# Altium PCB uppsense.PcbDoc
Units mm, origin at the board's own origin, x right, y up, seen from the top; angles counter-clockwise.
Board outline 80 x 50 mm, 2 copper layers (Top Layer, Bottom Layer), stack 1.58 mm thick; 39 components, 33 nets, 147 pads, 101 vias.
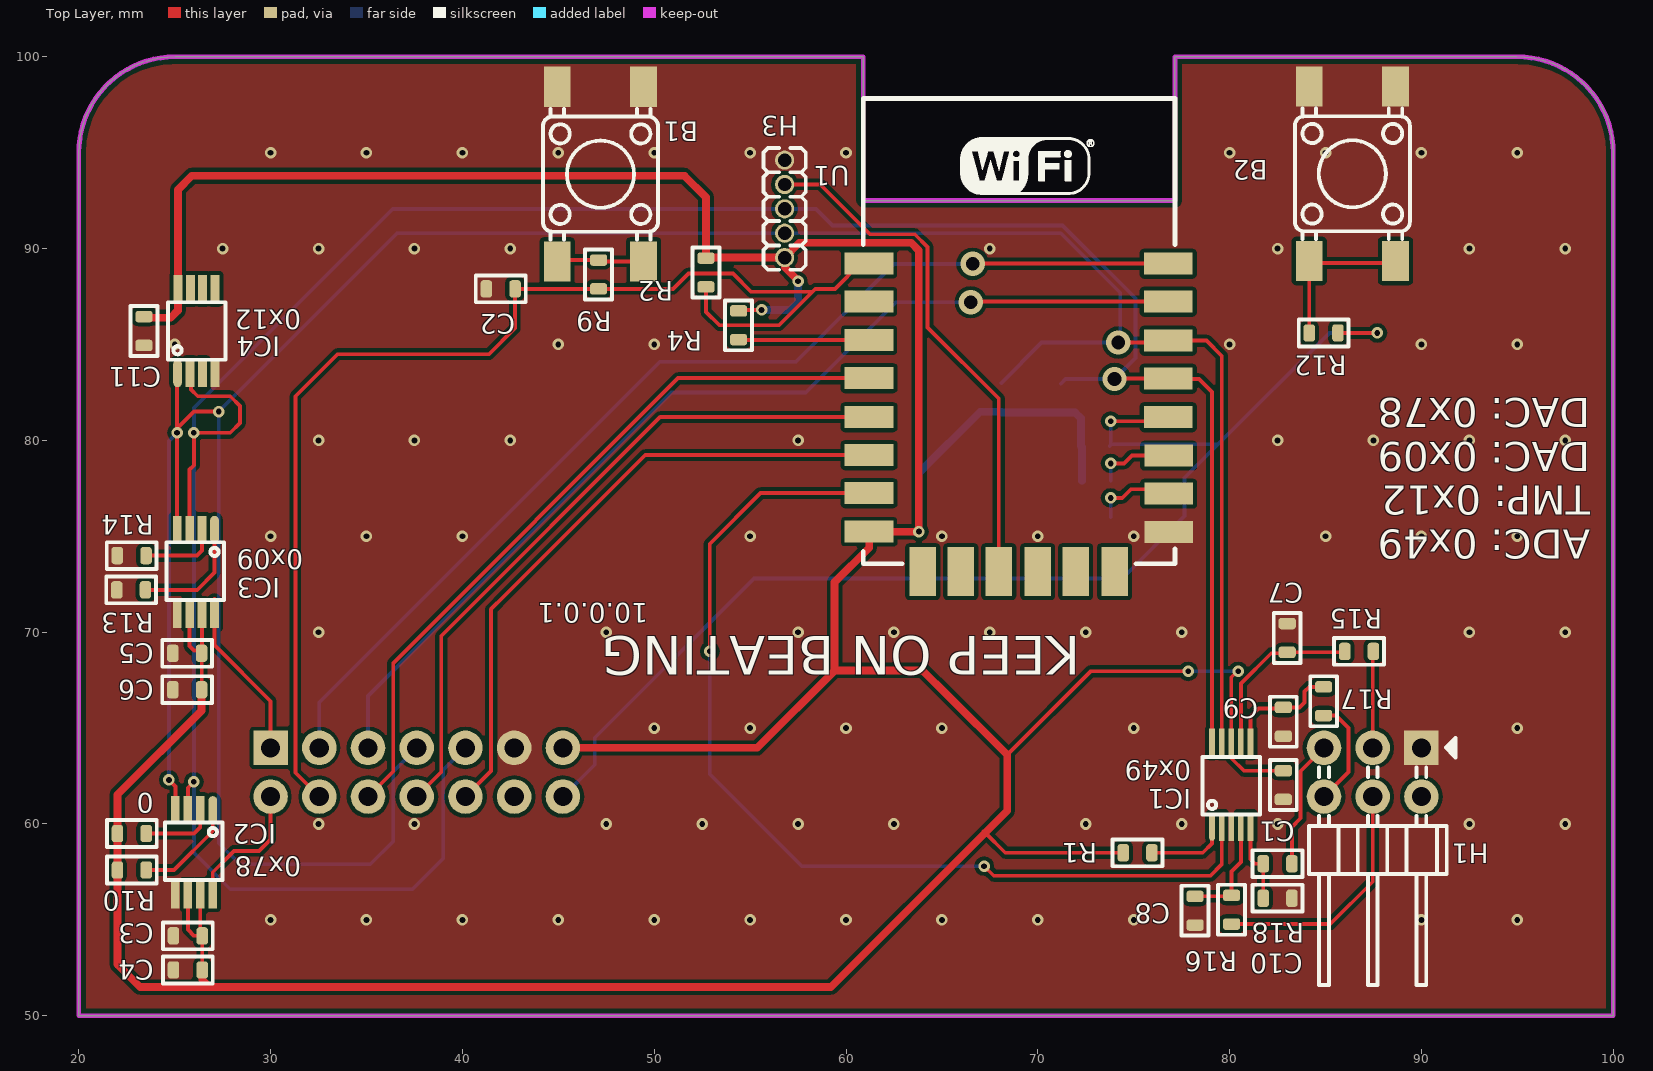
[diagram p0: Top Layer view]
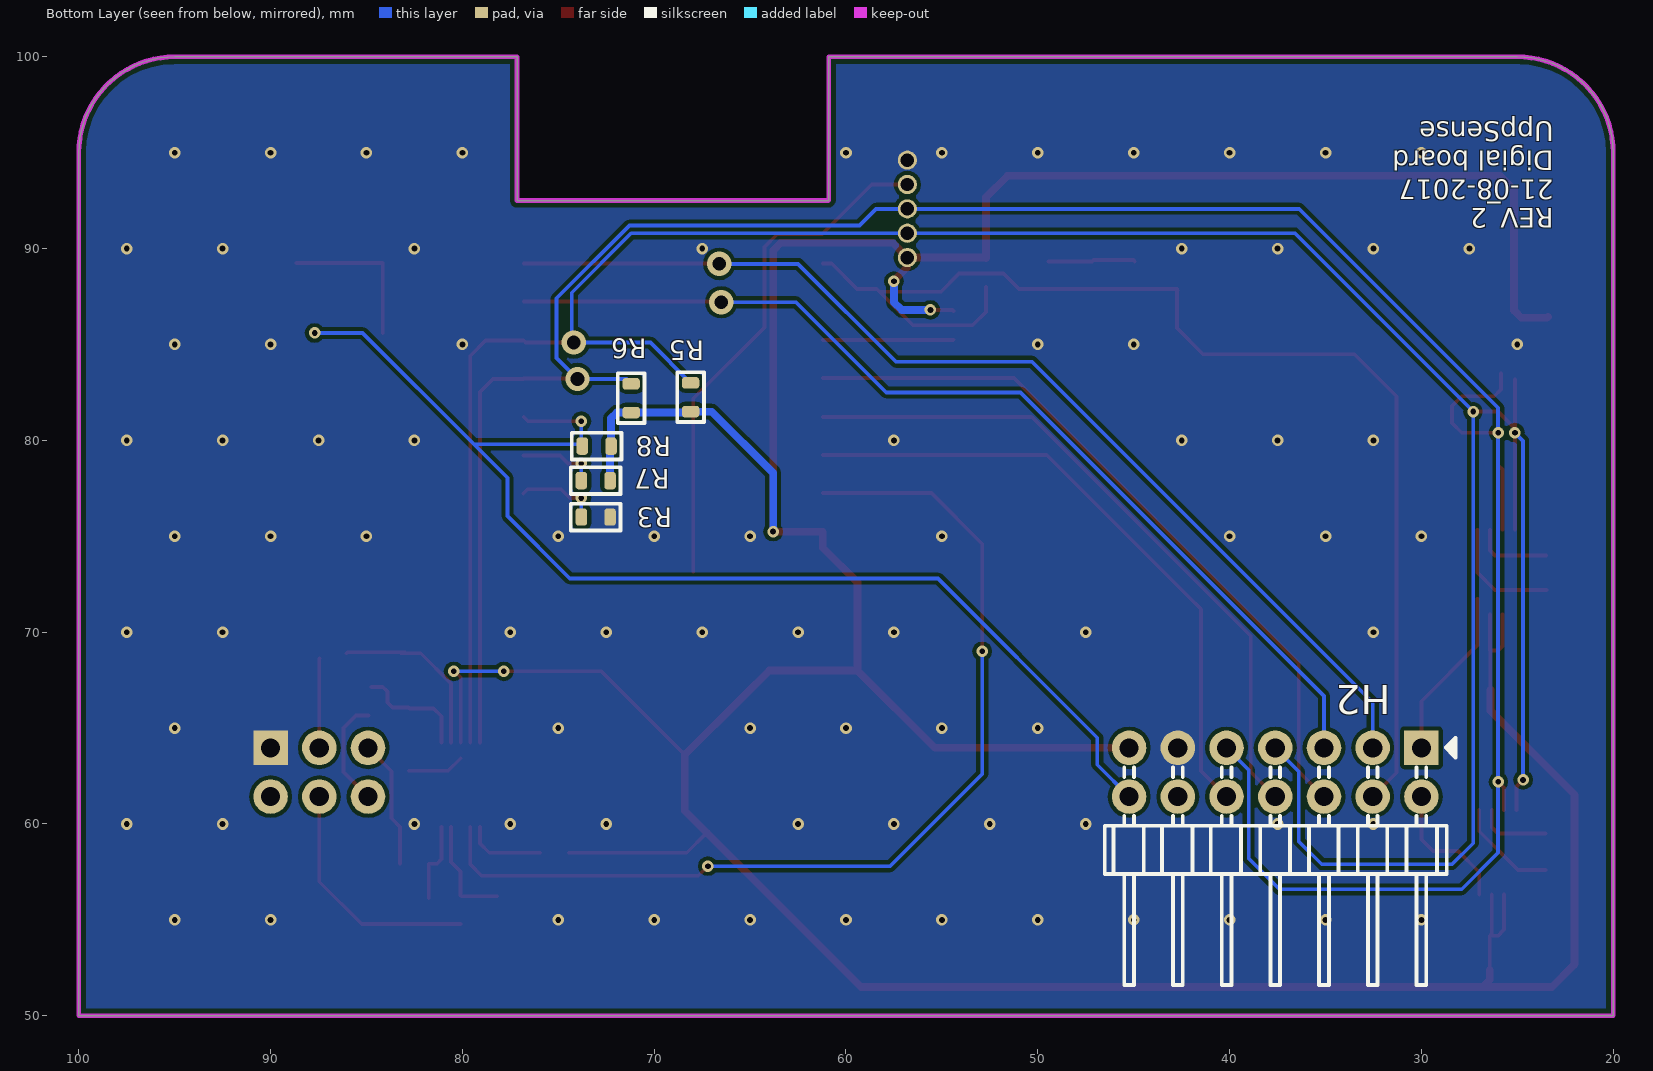
[diagram p1: Bottom Layer view, seen from below]

## Layer stack, top to bottom
Top Solder: solder mask 0.0102, Solder Resist, Dk 3.5
Top Layer: signal copper 0.0356
Dielectric 1: dielectric 1.509, FR-4, Dk 4.8
Bottom Layer: signal copper 0.0356
Bottom Solder: solder mask 0.0102, Solder Resist, Dk 3.5

## Board outline
20,50 20,95 cw(c25,95) 25,100 60.9,100 60.9,92.5 77.15,92.5 77.15,100 95,100 cw(c95,95) 100,95 100,50

## Design rules (kind name [scope] priority, off if disabled: settings)
Clearance Keepout_Polygon [OnLayer('Keep-Out Layer') vs InPolygon] p1: gap=0.25 ignorepadtopadclearanceinfootprint=FALSE except(0: Arc-Hole Track-Hole SMDPad-Hole THPad-Hole Via-Hole Fill-Hole Poly-Hole Region-Hole Text-Hole)
Clearance Keepout_track [OnLayer('Keep-Out Layer')] p2: gap=0.25 ignorepadtopadclearanceinfootprint=FALSE except(0: Arc-Hole Track-Hole SMDPad-Hole THPad-Hole Via-Hole Fill-Hole Poly-Hole Region-Hole Text-Hole)
Clearance Feducial [HasFootprint('FEDUCIAL')] p3: gap=1.1 ignorepadtopadclearanceinfootprint=FALSE except(0: Arc-Hole Track-Hole SMDPad-Hole THPad-Hole Via-Hole Fill-Hole Poly-Hole Region-Hole Text-Hole)
Clearance Polygons [InPolygon] p4: gap=0.2 ignorepadtopadclearanceinfootprint=FALSE except(0: Arc-Hole Track-Hole SMDPad-Hole THPad-Hole Via-Hole Fill-Hole Poly-Hole Region-Hole Text-Hole)
Clearance Large_Track [IsTrack AND AsMM(Width) > 0.2] p5: gap=0.2 ignorepadtopadclearanceinfootprint=FALSE except(0: Arc-Hole Track-Hole SMDPad-Hole THPad-Hole Via-Hole Fill-Hole Poly-Hole Region-Hole Text-Hole)
Clearance Default [All] p6: gap=0.15 ignorepadtopadclearanceinfootprint=FALSE except(0: Arc-Hole Track-Hole SMDPad-Hole THPad-Hole Via-Hole Fill-Hole Poly-Hole Region-Hole Text-Hole)
ComponentClearance Batterij_Clearance? [InComponentClass('Battery_Connection')] p1: gap=0 collisioncheckmode=3 verticalgap=0.1 showdistances=FALSE
ComponentClearance [All] p2: gap=0.1 collisioncheckmode=3 verticalgap=0.1 showdistances=FALSE
DiffPairsRouting [All] p1: maxlimit=1 minlimit=0.15 mostfreqgap=0.2 toplayer_minwidth=0.15 toplayer_maxwidth=10 toplayer_prefwidth=0.2 bottomlayer_minwidth=0.15 bottomlayer_maxwidth=10 bottomlayer_prefwidth=0.2 maxuncoupledlength=12.7
Height [All] p1: minheight=0 maxheight=1000 prefheight=12.7
HoleSize [All] p1: absolutevalues=TRUE maxlimit=20 minlimit=0.025 maxpercent=80.000 minpercent=20.000
MinimumSolderMaskSliver [All] p1: minsoldermaskwidth=0
PlaneClearance [All] p1: clearance=0.2
PolygonConnect Thermal_Plane [IsVia] p1: connectstyle=Direct reliefconductorwidth=0.25 reliefentries=4 polygonreliefangle="90 Angle" airgapwidth=0.2
PolygonConnect Thermal_Plane_1 [Name Like 'T_*'] p2: connectstyle=Relief reliefconductorwidth=0.25 reliefentries=4 polygonreliefangle="90 Angle" airgapwidth=0.2
PolygonConnect Solid_Plane [All] p3: connectstyle=Direct reliefconductorwidth=0.25 reliefentries=4 polygonreliefangle="90 Angle" airgapwidth=0.2
RoutingVias [All] p1: holewidth=0.3 width=0.6 viastyle="Through Hole" minholewidth=0.3 minwidth=0.6 maxholewidth=100 maxwidth=100
SilkToSilkClearance [All] p1: silktosilkclearance=0
SilkToSolderMaskClearance [IsPad] p1: minsilkscreentomaskgap=0 clearancetoexposedcopper=TRUE
SolderMaskExpansion [All] p1: expansion=0.102
Width [All] p1: maxlimit=100 minlimit=0.15 preferedwidth=0.2
22 further rules are at their usual default settings.

## Components (designator, comment, footprint, x,y, rotation, side; value= is the part's Value field where it differs from the comment)
0 "dnp" R0603 22.767,59.504 r180 top
B1 "Tactile_Button_4term" TACTILE_MINATUE_SMD_6x6mm 47.199,93.881 r180 top
B2 "Tactile_Button_4term" TACTILE_MINATUE_SMD_6x6mm 86.4,93.9 r180 top
C1 "100nF" C0603 82.8,62.03 r270 top
C2 "4.7uF" C0603 42,87.9 r180 top
C3 "100n" C0603 25.688,54.17 r180 top
C4 "4.7uF" C0603 25.688,52.392 r180 top
C5 "100n" C0603 25.65,68.9 r180 top
C6 "4.7uF" C0603 25.65,67 r180 top
C7 "100nF" C0603 83,69.7 r90 top
C8 "100nF" C0603 78.2,55.48 r270 top
C9 "100nF" C0603 82.8,65.33 r270 top
C10 "100nF" C0603 82.5,56.13 r0 top
C11 "100nF" C0603 23.4,85.7 r270 top
H1 "Header_2x3" HEADER_MALE_2x3_RIGHT_ANGLE 90,63.97 r180 top
H2 "Header_2x7" HEADER_MALE_2x7_RIGHT_ANGLE 30,63.97 r0 bottom
H3 "Header_5" Header_MALE_0.05INCH_5 56.8,94.61 r270 top
IC1 "ADS1115" 10-VSSOP-0.5 79.086,59.851 r0 top
IC2 "DAC101C085CIMM" 8-VSSOP 26.988,60.729 r180 top
IC3 "DAC101C085CIMM" 8-VSSOP 27.077,75.337 r180 top
IC4 "MCP9808" 8-MSOP 25.15,85.7 r0 top
R1 "0" R0603 75.2,58.5 r0 top
R2 "10k" R0603 52.7,88.75 r90 top
R3 "10k" R0603 73.05,76 r0 bottom
R4 "10k" R0603 54.4,86 r90 top
R5 "5k" R0603 68.1,82.25 r90 bottom
R6 "5k" R0603 71.2,82.2 r90 bottom
R7 "10k" R0603 73.05,77.9 r0 bottom
R8 "10k" R0603 73,79.7 r0 bottom
R9 "10k" R0603 47.1,88.65 r270 top
R10 "0" R0603 22.767,57.599 r180 top
R12 "470" R0603 84.9,85.6 r0 top
R13 "0" R0603 22.729,72.207 r180 top
R14 "0" R0603 22.758,73.991 r180 top
R15 "2.4k" R0603 86.75,69 r0 top
R16 "2.4k" R0603 80.1,55.53 r270 top
R17 "2.4k" R0603 84.9,66.4 r270 top
R18 "2.4k" R0603 82.5,57.93 r0 top
U1 "ESP12-E" ESP12-E 69.581,78.46 r0 top

## Footprints (in the part's own frame and the unit in brackets; to place one, negate y for a bottom-side part, rotate by r counter-clockwise, add the part's x,y. Pads: shape width x height; smd on the part's side, far side on the other; paste and mask are expansions set on the pad)
8-MSOP [mm] "Micro Small Outline Package"
  oval 0.45x1.45 smd: 1(0,-2.2)
  rect 0.45x1.45 smd: 2(0.65,-2.2) 3(1.3,-2.2) 4(1.95,-2.2) 5(1.95,2.2) 6(1.3,2.2) 7(0.675,2.2) 8(0.025,2.2)
  silkscreen extent -0.5,-1.5 2.5,1.5, body extent -0.6,-2.6 2.6,2.6, height 1.1
8-VSSOP [mm]
  oval 0.45x1.45 smd: 1(0,0)
  rect 0.45x1.45 smd: 2(0.65,0) 3(1.3,0) 4(1.95,0) 5(1.95,4.4) 6(1.3,4.4) 7(0.65,4.4) 8(0,4.4)
  silkscreen extent -0.5,0.65 2.5,3.65, body extent -0.6,-0.45 2.6,4.75, height 1.1
10-VSSOP-0.5 [mm]
  oval 0.3x1.45 smd: 1(0,0)
  rect 0.3x1.45 smd: 2(0.5,0) 3(1,0) 4(1.5,0) 5(2,0) 6(2,4.4) 7(1.5,4.4) 8(1,4.4) 9(0.5,4.4) 10(0,4.4)
  silkscreen extent -0.5,0.65 2.5,3.65, body extent -0.6,-0.45 2.6,4.77, height 1.1
C0603 [mm]
  rrect50% 0.6x0.9 smd: 1(-0.75,0) 2(0.75,0)
  silkscreen extent -1.3,-0.7 1.3,0.7, body extent -0.86,-0.41 0.86,0.41, height 0.81
ESP12-E [mil] "WIFI module"
  rect 100x45 smd: 1(-329.79,423.34) 2(-329.79,345.34) 3(-329.79,266.34) 4(-329.79,188.34) 5(-329.79,108.34) 6(-329.79,30.34) 7(-329.79,-47.66) 8(-329.79,-126.66) 15(285.21,-127.66) 16(285.21,-48.66) 17(285.21,29.34) 18(284.21,108.34) 19(284.21,187.34) 20(284.21,265.34) 21(284.21,345.34) 22(284.21,423.34)
  rect 55x100 smd: 9(-219.79,-208.66) 10(-141.79,-208.66) 11(-63.79,-208.66) 12(16.21,-208.66) 13(94.21,-208.66) 14(174.21,-208.66)
  silkscreen extent -342,-193 298,762, body extent -339,-185 291,760
Header_MALE_0.05INCH_5 [mm]
  round 1 hole 0.7: 1(0,0) 2(1.27,0) 3(2.54,0) 4(3.81,0) 5(5.08,0)
  silkscreen extent -0.64,-1.1 5.71,1.1, body extent -0.63,-1.1 5.72,1.1, height 4
HEADER_MALE_2x3_RIGHT_ANGLE [mm] "Right angle"
  rect 1.8x1.8 hole 1: 1(0,0)
  round 1.8 hole 1: 2(0,2.54) 3(2.54,0) 4(2.54,2.54) 5(5.08,0) 6(5.08,2.54)
  silkscreen extent -1.78,-0.52 5.86,12.37, body extent -1.32,-0.32 5.9,12.37, height 4.93
HEADER_MALE_2x7_RIGHT_ANGLE [mm]
  rect 1.8x1.8 hole 1: 1(0,0)
  round 1.8 hole 1: 2(0,2.54) 3(2.54,0) 4(2.54,2.54) 5(5.08,0) 6(5.08,2.54) 7(7.62,0) 8(7.62,2.54) 9(10.16,0) 10(10.16,2.54) 11(12.7,0) 12(12.7,2.54) 13(15.24,0) 14(15.24,2.54)
  silkscreen extent -1.78,-0.52 16.51,12.37, body extent -1.29,-0.32 16.54,12.42, height 6
R0603 [mm]
  rrect50% 0.6x0.9 smd: 1(-0.75,0) 2(0.75,0)
  silkscreen extent -1.3,-0.7 1.3,0.7, body extent -0.86,-0.41 0.86,0.41, height 0.51
TACTILE_MINATUE_SMD_6x6mm [mm] "TE CONNECTIVITY FSM"
  rect 1.4x2.1 smd: 1(2.25,4.55) 2(2.25,-4.55) 3(-2.25,4.55) 4(-2.25,-4.55)
  silkscreen extent -3,-3.4 3,3.4, body extent -3,-5 3,5, height 5

## Part data
0 R1 R2 R3 R4 R5 R6 R7 R8 R9 R10 R12 R13 R14 R15 R16 R17 R18: library part Resistor, "Schematic symbol of a resistor"
C1 C2 C3 C4 C5 C6 C7 C8 C9 C10 C11: library part Capacitor, "Schematic symbol of a capacitor"
H1: "Generic 6pin header symbol"
H2: "Generic 14pin header symbol"
H3: "Generic 5pin header symbol", Supplier Part Number 1=S1012EC-40-ND, Supplier 1=Digi-Key
IC1: "ADS111x  Ultra-Small,  Low-Power,  I  2  C-Compatible,  860-SPS,  16-Bit  ADCs"
IC2 IC3: "DAC101C08xx  10-Bit  Micro Power  Digital-to-Analog  Converter  With an I  2  C-Compatible  Interface"
IC4: "v±0.5°C Maximum Accuracy   Digital Temperature Sensor"

## Via types
v1: diameter 0.6, hole 0.3, Top Layer to Bottom Layer, tented both sides, 97 vias
v2: diameter 1.27, hole 0.711, Top Layer to Bottom Layer, tented both sides, 4 vias

## Nets (pads, with @x,y where several pads share a name; then routed paths per layer and width w, separated by ;. In a path a pad name is that pad's centre, name@x,y a point inside that pad or via, vN(x,y) a via of type N, cw(c..) or ccw(c..) an arc to the next point about the centre after c; other vN are vias at no path point)
3V3: 0.2 C1.1 C3.1 C4.1 C5.1 C6.1 C11.1 H2.13 H3.5 IC1.8 IC2.6 IC2.7 IC3.6 IC3.7 IC4.8 R1.1 R2.2 R4.2 R5.1 R6.1 R7.1 R8.1 R10.2 U1.8 | length 237.6
  Top Layer w0.2: IC2.6 25.688,54.496 26.014,54.17 C3.1 ; IC3.6 25.777,69.272 26.002,69.047 26.427,69.047 IC3.7 ; IC2.7 26.338,54.27 C3.1 ; C6.1@26.412,67.012 C5.1@26.412,69.032 ; C4.1 C3.1 ; R4.2 54.45,86.8 v1(55.6,86.8) ; 65.258,66.7 65.3,66.7 ; 67.25,59.55 68.3,58.5 R1.1 ; 68.4,63.6 72.75,67.95 72.74,67.96 v1(77.84,67.96) ; 80.086,63.43 80.736,62.78 C1.1 ; IC1.8 80.086,67.649 80.449,68.012 v1(80.449,67.96)
  Top Layer w0.4: C11.1 23.45,86.4 24.8,86.4 25.175,86.775 IC4.8 25.175,93.075 25.9,93.8 51.577,93.8 52.7,92.677 R2.2 52.73,89.53 H3.5 ; C6.1 26.4,65.9 22.017,61.517 0.2 R10.2 22.017,52.683 22.05,52.65 23.2,51.5 26.823,51.5 ; C4.1 26.438,51.885 26.823,51.5 ; H2.13 55.37,63.97 59.4,68 ; v1(57.5,88.3) 57.5,88.331 56.8,89.031 H3.5 ; 26.823,51.5 59.2,51.5 67.25,59.55 68.4,60.7 68.4,63.6 65.3,66.7 64,68 59.4,68 ; H3.5 57.57,90.3 63.4,90.3 63.8,89.9 v1(63.8,75.243) U1.8 61.204,74.404 59.4,72.6 59.4,68
  Bottom Layer w0.2: v1(77.84,67.96) v1(80.449,67.96)
  Bottom Layer w0.4: v1(55.6,86.8) 57.1,86.8 57.5,87.2 v1(57.5,88.3) ; v1(63.8,75.243) 63.8,78.3 67,81.5 R5.1 68.15,81.45 R6.1 71.95,81.45 72.25,81.15 R8.1 72.3,79.65 R7.1
ADC1: H1.3 R15.2 | length 5.2
  Top Layer w0.2: R15.2@87.45,68.63 87.46,68.62 H1.3 H1.3@87.46,63.43
ADC2: H1.4 R16.2 | length 12.7
  Top Layer w0.2: R16.2 85.25,54.78 87.46,56.99 H1.4
ADC3: H1.6 R17.2 | length 5.7
  Top Layer w0.2: R17.2 85.55,65.65 86.2,65 86.2,62.71 H1.6
ADC4: H1.5 R18.2 | length 6.7
  Top Layer w0.2: R18.2 83.25,59.85 83.7,60.3 83.7,62.75 H1.5
ADClp1: C7.1 IC1.7 R15.1 | length 9.4
  Top Layer w0.2: IC1.7 80.6,64.265 80.6,67.333 82.167,68.9 C7.1@83.213,68.9 ; C7.1 86,68.95 R15.1@86.05,68.9
ADClp2: C8.1 IC1.4 R16.1 | length 5.7
  Top Layer w0.2: C8.1 80.05,56.23 R16.1 80.1,57.53 80.586,58.016 IC1.4
ADClp3: C9.1 IC1.6 R17.1 | length 6
  Top Layer w0.2: IC1.6 81.086,65.616 81.5,66.03 82.75,66.03 C9.1 83.65,66.08 83.9,66.33 83.9,66.9 84.15,67.15 R17.1@84.73,67.15
ADClp4: C10.1 IC1.5 R18.1 | length 4.2
  Top Layer w0.2: IC1.5 81.086,58.173 81.329,57.93 R18.1 C10.1
ADS_READY: IC1.2 U1.7 | length 52.5
  Top Layer w0.2: v1(52.9,69) 52.9,74.6 55.55,77.25 U1.7 ; v1(67.2,57.8) 67.7,57.3 79,57.3 79.586,57.886 IC1.2
  Bottom Layer w0.2: v1(52.9,69) 52.9,62.6 57.7,57.8 v1(67.2,57.8)
DAC1: H2.1 IC3.8 | length 9
  Top Layer w0.2: 27.077,71.729 IC3.8 27.077,69.323 30,66.4 H2.1
DAC2: H2.2 IC2.8 | length 7.1
  Top Layer w0.2: IC2.8 26.988,57.488 28.1,58.6 29.4,58.6 30,59.2 H2.2
GND: B1.2 B1.4 B2.2 B2.4 C1.2 C2.2 C3.2 C4.2 C5.2 C6.2 C7.2 C8.2 C9.2 C10.2 C11.2 H1.1 H2.11 H3.1 IC1.3 IC2.5 IC3.5 IC4.4 R3.1 R13.2 R14.2 U1.15
  other v1: 30,55 35,55 40,55 45,55 50,55 55,55 60,55 65,55 70,55 75,55 90,55 95,55 32.5,60 37.5,60 47.5,60 52.5,60 57.5,60 62.5,60 72.5,60 77.5,60 82.5,60 92.5,60 97.5,60 50,65 55,65 60,65 65,65 75,65 95,65 32.5,70 47.5,70 57.5,70 62.5,70 67.5,70 72.5,70 77.5,70 92.5,70 97.5,70 30,75 35,75 40,75 55,75 65,75 70,75 75,75 85,75 90,75 95,75 32.5,80 37.5,80 42.5,80 57.5,80 82.5,80 87.5,80 92.5,80 97.5,80 25,85 45,85 50,85 80,85 90,85 95,85 27.5,90 32.5,90 37.5,90 42.5,90 67.5,90 82.5,90 92.5,90 97.5,90 30,95 35,95 40,95 45,95 50,95 55,95 60,95 80,95 85,95 90,95 95,95
GPIO0: H2.14 R8.2 R12.2 U1.18 | length 66.6
  Top Layer w0.2: v1(73.8,81) 76.588,81 U1.18 ; R12.2 v1(87.7,85.6)
  Bottom Layer w0.2: H2.14 46.9,63.09 46.9,64.5 55.2,72.8 74.4,72.8 77.65,76.05 77.65,78.05 79.4,79.8 ; R8.2 73.8,79.75 v1(73.8,81) v1@73.95,81.15 ; R8.2@73.95,79.8 79.4,79.8 ; v1(87.7,85.6) 85.2,85.6 79.4,79.8
GPIO2: H2.10 U1.6 | length 33.4
  Top Layer w0.2: H2.10 41.5,62.77 41.5,71.2 42.2,71.9 49.531,79.231 U1.6
GPIO3: H2.8 U1.5 | length 35.9
  Top Layer w0.2: H2.8 38.9,62.71 38.9,69.8 50.312,81.212 U1.5
GPIO4: H2.6 U1.4 | length 38.5
  Top Layer w0.2: H2.6 36.4,62.75 36.4,68.4 51.244,83.244 U1.4
Net0_1: 0.1 IC2.2 | length 3.9
  Top Layer w0.2: 0.1 26.004,59.504 26.338,59.838 IC2.2
NetB1_1: B1.1 B1.3 R9.1 | length 4.6
  Top Layer w0.2: B1.1 45.018,89.4 R9.1 47.169,89.331 B1.3
NetB2_1: B2.1 B2.3 R12.1 | length 8.1
  Top Layer w0.2: R12.1 84.15,89.25 B2.3@88.65,89.25
NetIC1_1: IC1.1 R1.2 | length 4.2
  Top Layer w0.2: R1.2 78.6,58.5 79.086,58.986 IC1.1
NetIC2_1: IC2.1 R10.1 | length 5.4
  Top Layer w0.2: R10.1 24.966,57.599 26.988,59.62 IC2.1
NetIC3_1: IC3.1 R13.1 | length 6.2
  Top Layer w0.2: R13.1 26.174,72.207 27.077,73.11 IC3.1
NetIC3_2: IC3.2 R14.1 | length 4.1
  Top Layer w0.2: R14.1 26.164,73.991 26.427,74.254 IC3.2
NetR3_2: R3.2 U1.16 | length 4.3
  Top Layer w0.2: v1(73.8,77) 74.4,77 ; 74.4,77 74.85,77.45 76.6,77.45 U1.16
  Bottom Layer w0.2: R3.2 v1(73.8,77)
NetR4_1: R4.1 U1.3 | length 6.8
  Top Layer w0.2: R4.1 54.425,85.225 U1.3
NetR7_2: R7.2 U1.17 | length 4.1
  Top Layer w0.2: v1(73.8,78.8) 74.5,78.8 74.906,79.206 U1.17
  Bottom Layer w0.2: R7.2 v1(73.8,78.8)
nRst: C2.1 H2.4 R2.1 R9.2 U1.1 | length 64.1
  Top Layer w0.2: H2.4 31.3,62.67 31.3,82.3 33.487,84.487 41.387,84.487 42.75,85.85 C2.1@42.75,87.85 ; C2.1@42.7,87.8 C2.1@42.75,87.85 ; C2.1 C2.1@42.75,87.85 ; R2.1 52.7,86.7 53.4,86 56.5,86 58.25,87.75 ; U1.1 60.746,89.213 59.433,87.9 58.4,87.9 58.25,87.75 ; C2.1@42.75,87.85 42.8,87.9 R9.2 50.984,87.9 51.784,88.7 54.1,88.7 55.05,87.75 58.25,87.75
Reset: H3.2 U1.11 | length 27.3
  Top Layer w0.2: H3.2 58.66,93.34 61.25,90.75 63.586,90.75 64.25,90.086 64.25,85.89 67.961,82.179 U1.11
SCL: H2.9 H3.3 IC1.10 IC2.3 IC3.3 IC4.2 R6.2 U1.19 | length 144.5
  Top Layer w0.2: IC2.3 25.688,61.888 v1(26,62.2) ; IC3.3 25.777,78.477 26,78.7 v1(26,80.4) 27.9,80.4 28.4,80.9 28.4,81.8 27.9,82.3 26.2,82.3 25.85,82.65 IC4.2@25.85,83.5 ; v2(74,83.2) 74.019,83.219 U1.19 76.819,83.2 78.4,83.2 79.086,82.514 IC1.10
  Bottom Layer w0.2: H2.9 39,62.81 39,58.2 37.4,56.6 27.9,56.6 26,58.5 v1(26,62.2) v1(26,80.4) 26,81.7 36.37,92.07 H3.3 58.43,92.07 59.3,91.2 71.295,91.2 75.085,87.41 75.085,84.315 75.1,84.3 v2(74,83.2) 71.45,83.2 R6.2
SDA: H2.7 H3.4 IC1.9 IC2.4 IC3.4 IC4.1 R5.2 U1.20 | length 156
  Top Layer w0.2: v1(24.7,62.3) 25.038,61.962 IC2.4 ; IC3.4 v1(25.127,80.4) v1@25.127,80.627 ; IC4.1@25.127,83.173 v1@25.127,80.627 ; v1(27.3,81.5) 26,81.5 v1@25.127,80.627 ; v2(74.2,85.1) 76.7,85.1 U1.20 78.8,85.2 79.586,84.414 IC1.9
  Bottom Layer w0.2: v1(24.7,62.3) 24.7,79.973 v1(25.127,80.4) ; H2.7 36.4,62.75 36.4,59.1 35.2,57.9 28.4,57.9 27.3,59 v1(27.3,81.5) 36.6,90.8 H3.4 71.2,90.8 74.3,87.7 74.3,85.2 v2(74.2,85.1) 70.2,85.1 R5.2
URX: H2.3 U1.22 | length 56.1
  Top Layer w0.2: v2(66.6,89.2) 66.613,89.213 U1.22
  Bottom Layer w0.2: H2.3 32.54,66.34 50.3,84.1 57.4,84.1 62.5,89.2 v2(66.6,89.2)
UTX: H2.5 U1.21 | length 52.9
  Top Layer w0.2: v2(66.5,87.2) 66.532,87.232 U1.21
  Bottom Layer w0.2: H2.5 35.08,66.68 50.9,82.5 57.9,82.5 62.6,87.2 v2(66.5,87.2)
pads on no net: H1.2 H2.12 IC4.3 IC4.5 IC4.6 IC4.7 U1.2 U1.9 U1.10 U1.12 U1.13 U1.14

## Polygon pours and split planes (outlines as drawn)
GND on Top Layer "TOP_GND" (solid, pour order 2): 20,50 20,95 cw(c25,95) 25,100 60.9,100 60.9,92.5 77.15,92.5 77.15,100 95,100 cw(c95,95) 100,95 100,50
GND on Bottom Layer "BOT_GND" (solid, pour order 3): 20,50 20,95 cw(c25,95) 25,100 60.9,100 60.9,92.5 77.15,92.5 77.15,100 95,100 cw(c95,95) 100,95 100,50

## Keep-outs
Keep-Out Layer:
  lines w0.254: 20,50 100,50 100,95 ccw(c95,95) 95,100 77.15,100 77.15,92.5 60.925,92.5 60.9,92.525 60.9,100 25,100 ccw(c25,95) 20,95 20,50

## Silkscreen, mask and mechanical layers (free items; w line width, h text height)
Top Overlay:
  text "0x12" at 31.6,86.8 h1 r180
  text "ADC: 0x49 / TMP: 0x12 / DAC: 0x09 / DAC: 0x78" at 98.8,82.2 h1.52 r180
  text "0x09" at 31.7,74.3 h1 r180
  text "10.0.0.1" at 49.7,71.5 h1 r180
  text "KEEP ON BEATING" at 72.2,69.8 h2 r180
  text "0x49" at 78,63.3 h1 r180
  text "0x78" at 31.6,58.3 h1 r180
Bottom Overlay:
  text "REV_2 / 21-08-2017 / Digial board / UppSense" at 23.1,96.6 h1 r180
Mechanical 1:
  the board outline again, w0.254

## Text inside footprints (layer, text, board x,y; h text height)
U1: Mechanical 13 "CUTOUT POLYGON" at 61.205,96.696 h0.25; Mechanical 13 "ANTENNA AREA" at 61.205,97.204 h0.25